# Altium PCB SDR_PCB.PcbDoc
Units mm, origin at the board's own origin, x right, y up, seen from the top; angles counter-clockwise.
Board outline 213.87 x 162.94 mm, 2 copper layers (Top Layer, Bottom Layer); 68 components, 64 nets, 444 pads, 6 vias.
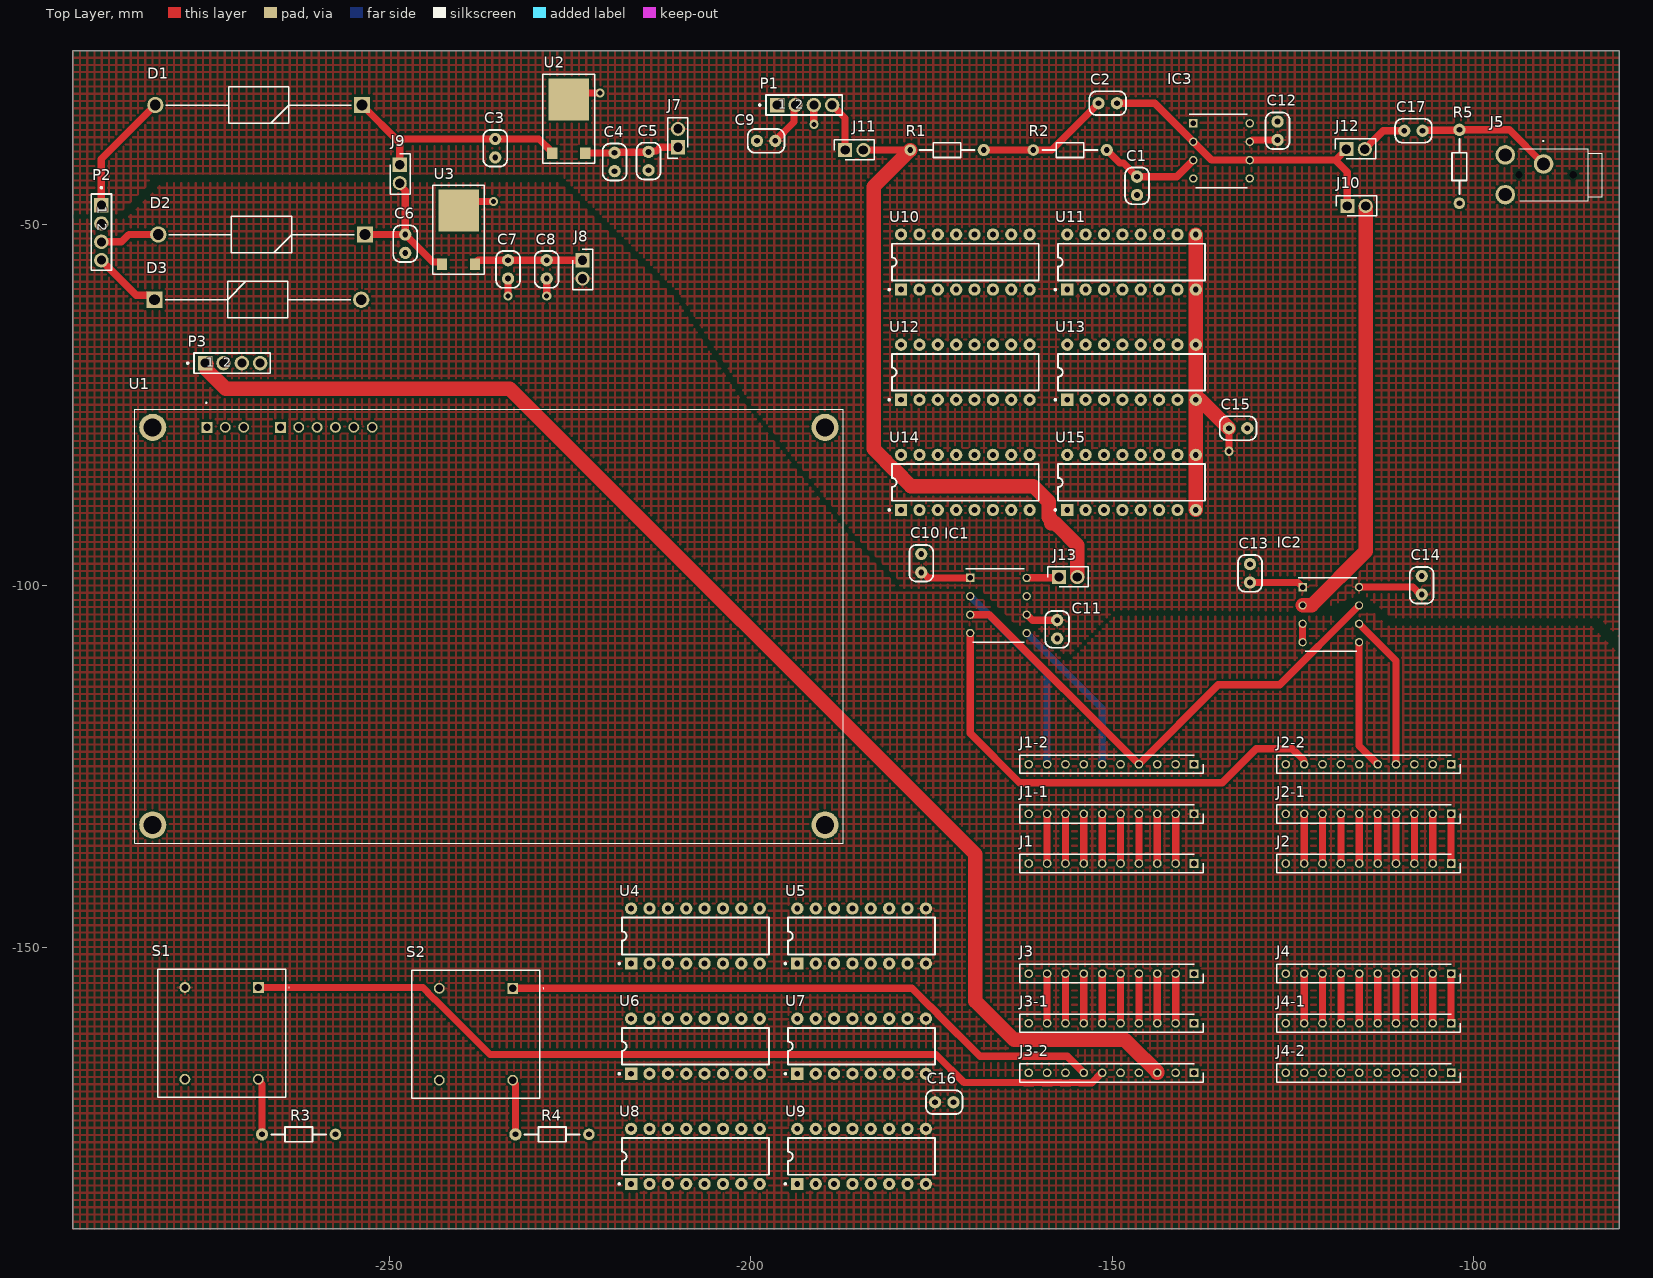
[diagram p0: Top Layer view]
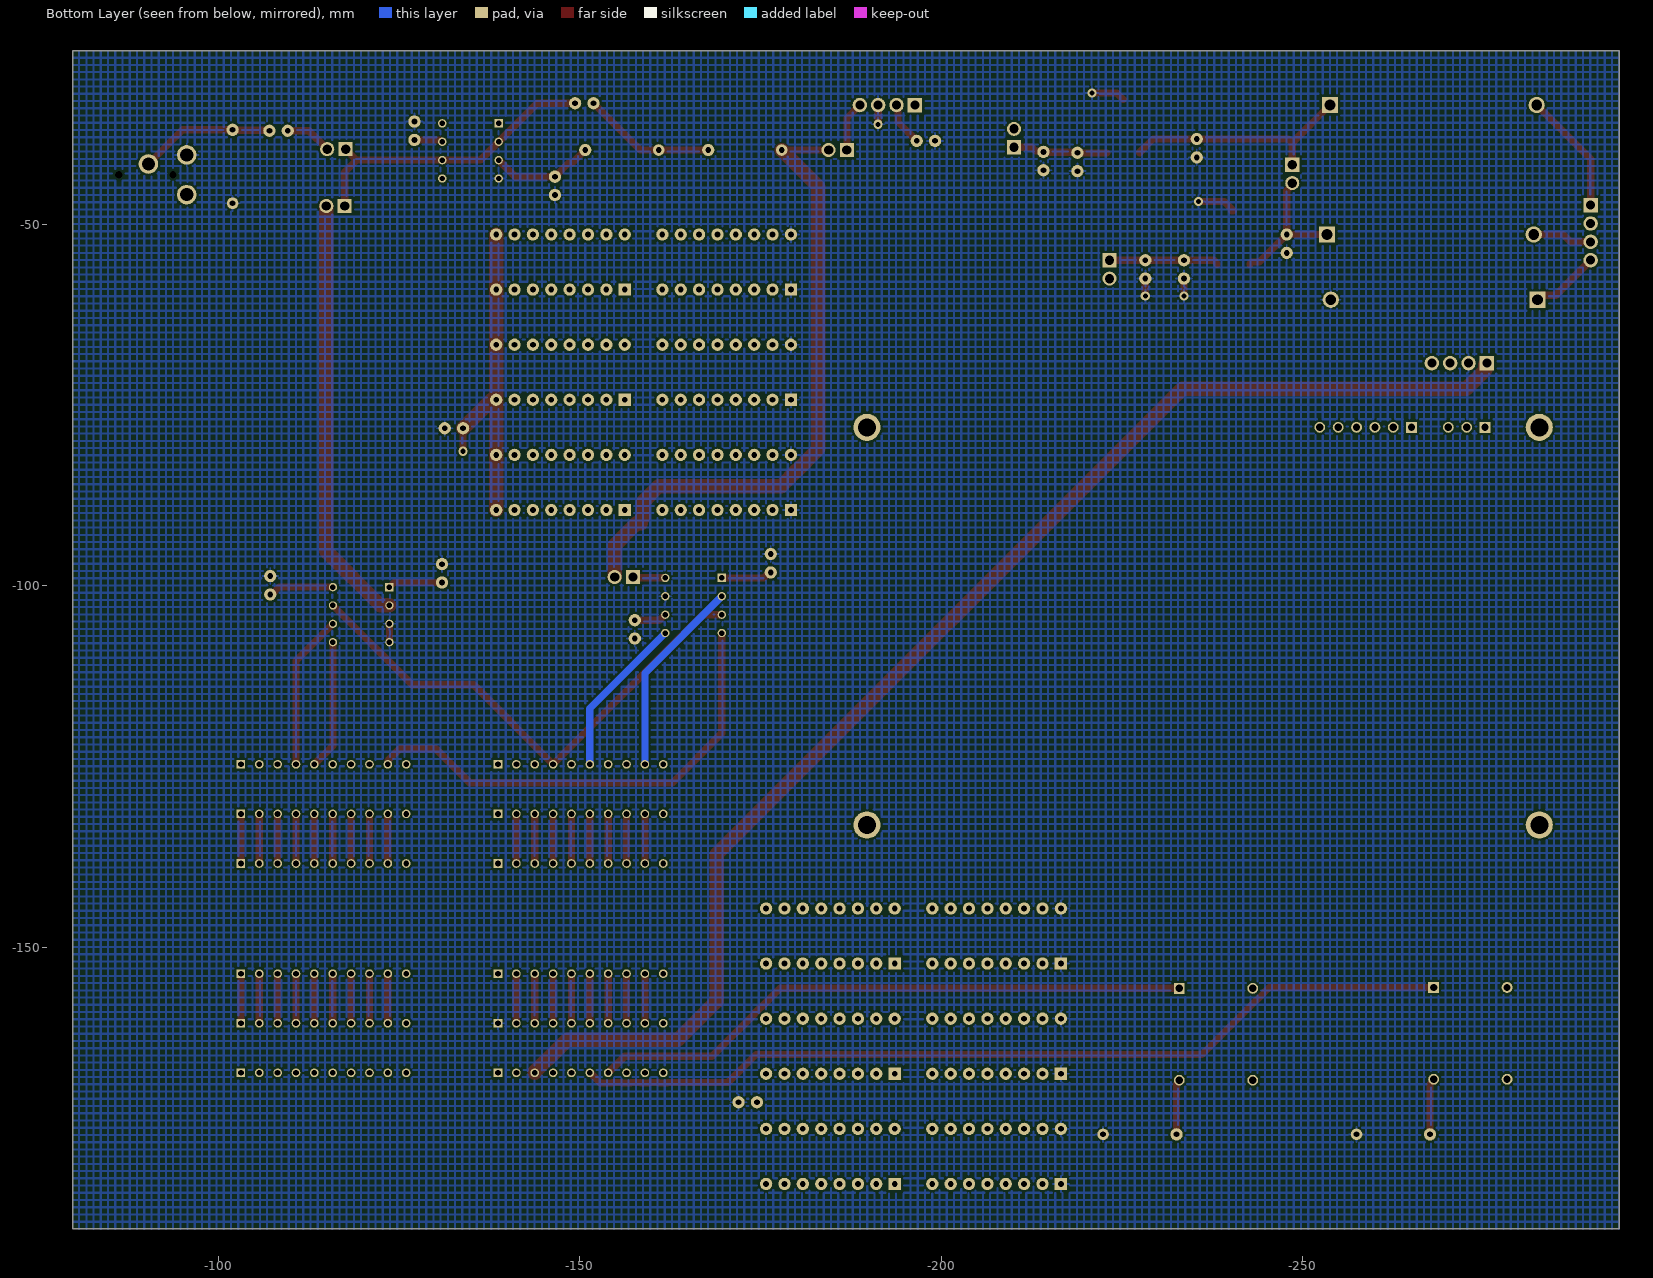
[diagram p1: Bottom Layer view, seen from below]

## Layer stack, top to bottom
Top Solder: solder mask 0.0102, Solder Resist, Dk 3.5
Top Layer: signal copper 0.0356
Dielectric 1: dielectric 0.32, FR-4, Dk 4.8
Bottom Layer: signal copper 0.0356
Bottom Solder: solder mask 0.0102, Solder Resist, Dk 3.5

## Board outline
-293.751,-188.976 -79.883,-188.976 -79.883,-26.035 -293.751,-26.035

## Design rules (kind name [scope] priority, off if disabled: settings)
Clearance [All] p1: gap=0.3 ignorepadtopadclearanceinfootprint=FALSE
PolygonConnect [All] p1: connectstyle=Relief reliefconductorwidth=0.254 reliefentries=4 polygonreliefangle="90 Angle" airgapwidth=0.254
RoutingVias [All] p1: holewidth=0.711 width=1.27 viastyle="Through Hole" minholewidth=0.711 minwidth=1.27 maxholewidth=0.711 maxwidth=1.27
SolderMaskExpansion [All] p1: expansion=0.102 istentingtop=FALSE
Width [All] p1: maxlimit=2 minlimit=0.3 preferedwidth=1 minimp=50.000000 maximp=50.000000 favimp=50.000000
30 further rules are at their usual default settings.

## Components (designator, comment, footprint, x,y, rotation, side; value= is the part's Value field where it differs from the comment)
C1 "4.7nF" CAPACITOR_100NF_TH -146.558,-45.974 r90 top
C2 "12nF" CAPACITOR_100NF_TH -151.892,-33.274 r0 top
C3 "10u" CAPACITOR_100NF_TH -235.331,-40.767 r90 top
C4 "10u" CAPACITOR_100NF_TH -218.821,-42.672 r90 top
C5 "100n" CAPACITOR_100NF_TH -214.122,-42.545 r90 top
C6 "10u" CAPACITOR_100NF_TH -247.777,-53.975 r90 top
C7 "10u" CAPACITOR_100NF_TH -233.553,-57.531 r90 top
C8 "100n" CAPACITOR_100NF_TH -228.219,-57.531 r90 top
C9 "100n" CAPACITOR_100NF_TH -196.596,-38.481 r180 top
C10 "100n" CAPACITOR_100NF_TH -176.403,-98.171 r90 top
C11 "100n" CAPACITOR_100NF_TH -157.607,-107.315 r90 top
C12 "100n" CAPACITOR_100NF_TH -127.127,-35.814 r270 top
C13 "100n" CAPACITOR_100NF_TH -130.937,-99.568 r90 top
C14 "100n" CAPACITOR_100NF_TH -107.188,-101.219 r90 top
C15 "100n" CAPACITOR_100NF_TH -131.318,-78.232 r180 top
C16 "100n" CAPACITOR_100NF_TH -171.958,-171.45 r180 top
C17 "10u" CAPACITOR_100NF_TH -107.061,-37.084 r180 top
D1 "SB350-E3_54" DIOAD2855W132L835D505 -253.746,-33.528 r180 top
D2 "SB350-E3_54" DIOAD2855W132L835D505 -253.34,-51.435 r180 top
D3 "SB350-E3_54" DIOAD2855W132L835D505 -282.473,-60.452 r0 top
IC1 "MCP4921-E_P" DIP781W56P254L950H533Q8N -165.735,-102.743 r0 top
IC2 "MCP3201-CI_P" DIP781W56P254L950H533Q8N -119.761,-104.013 r0 top
IC3 "MCP6231-E_P" DIP781W56P254L950H533Q8N -134.874,-39.878 r0 top
J1 "801-87-010-10-001101" RHDR10W60P0X254_1X10_2540X254X700P -138.684,-138.43 r180 top
J1-1 "801-87-010-10-001101" RHDR10W60P0X254_1X10_2540X254X700P -138.684,-131.572 r180 top
J1-2 "801-87-010-10-001101" RHDR10W60P0X254_1X10_2540X254X700P -138.684,-124.714 r180 top
J2 "801-87-010-10-001101" RHDR10W60P0X254_1X10_2540X254X700P -103.124,-138.43 r180 top
J2-1 "801-87-010-10-001101" RHDR10W60P0X254_1X10_2540X254X700P -103.124,-131.572 r180 top
J2-2 "801-87-010-10-001101" RHDR10W60P0X254_1X10_2540X254X700P -103.124,-124.714 r180 top
J3 "801-87-010-10-001101" RHDR10W60P0X254_1X10_2540X254X700P -138.684,-153.67 r180 top
J3-1 "801-87-010-10-001101" RHDR10W60P0X254_1X10_2540X254X700P -138.684,-160.528 r180 top
J3-2 "801-87-010-10-001101" RHDR10W60P0X254_1X10_2540X254X700P -138.684,-167.386 r180 top
J4 "801-87-010-10-001101" RHDR10W60P0X254_1X10_2540X254X700P -103.124,-153.67 r180 top
J4-1 "801-87-010-10-001101" RHDR10W60P0X254_1X10_2540X254X700P -103.124,-160.528 r180 top
J4-2 "801-87-010-10-001101" RHDR10W60P0X254_1X10_2540X254X700P -103.124,-167.386 r180 top
J5 "STX-3000" STX3000 -90.333,-41.68 r180 top
J7 "MKK1X2" RHDR2W79P0X254_1X2_559X241X851P -210.058,-39.37 r90 top
J8 "MKK1X2" RHDR2W79P0X254_1X2_559X241X851P -223.266,-54.991 r270 top
J9 "MKK1X2" RHDR2W79P0X254_1X2_559X241X851P -248.539,-41.783 r270 top
J10 "MKK1X2" RHDR2W79P0X254_1X2_559X241X851P -117.475,-47.498 r0 top
J11 "MKK1X2" RHDR2W79P0X254_1X2_559X241X851P -186.944,-39.751 r0 top
J12 "MKK1X2" RHDR2W79P0X254_1X2_559X241X851P -117.602,-39.624 r0 top
J13 "MKK1X2" RHDR2W79P0X254_1X2_559X241X851P -157.353,-98.806 r0 top
P1 "Microphone Module" HDH1X4 1054.735,1219.708 r0 top
P2 "UART and Power" HDH1X4 963.422,-1298.448 r270 top
P3 "UART and Power" HDH1X4 975.614,1184.015 r0 top
R1 "Resistor (IO board)" RESISTOR_10K_TH_QW -177.927,-39.751 r0 top
R2 "Resistor (IO board)" RESISTOR_10K_TH_QW -160.909,-39.751 r0 top
R3 "Resistor (IO board)" RESISTOR_10K_TH_QW -257.429,-175.895 r180 top
R4 "Resistor (IO board)" RESISTOR_10K_TH_QW -222.377,-175.895 r180 top
R5 "Resistor (IO board)" RESISTOR_10K_TH_QW -101.981,-47.117 r90 top
S1 "JF15SP3G" JF15SP3G -268.097,-155.575 r0 top
S2 "JF15SP3G" JF15SP3G -232.918,-155.702 r0 top
U1 "NHD-0420D3Z-FL-GBW-V3" NHD0420D3ZFLGBWV3 -275.209,-78.105 r0 top
U2 "L78M05CDT(3)" TO_252 -227.451,-40.166 r0 top
U3 "L78M05CDT(3)" TO_252 -242.691,-55.533 r0 top
U4 "ULN2003" "DILP-16(300) - 3D" -216.535,-152.273 r90 top
U5 "ULN2003" "DILP-16(300) - 3D" -193.548,-152.273 r90 top
U6 "ULN2003" "DILP-16(300) - 3D" -216.535,-167.513 r90 top
U7 "ULN2003" "DILP-16(300) - 3D" -193.548,-167.513 r90 top
U8 "ULN2003" "DILP-16(300) - 3D" -216.535,-182.753 r90 top
U9 "ULN2003" "DILP-16(300) - 3D" -193.548,-182.753 r90 top
U10 "ULN2003" "DILP-16(300) - 3D" -179.197,-59.055 r90 top
U11 "ULN2003" "DILP-16(300) - 3D" -156.21,-59.055 r90 top
U12 "ULN2003" "DILP-16(300) - 3D" -179.197,-74.295 r90 top
U13 "ULN2003" "DILP-16(300) - 3D" -156.21,-74.295 r90 top
U14 "ULN2003" "DILP-16(300) - 3D" -179.197,-89.535 r90 top
U15 "ULN2003" "DILP-16(300) - 3D" -156.21,-89.535 r90 top

## Footprints (in the part's own frame and the unit in brackets; to place one, negate y for a bottom-side part, rotate by r counter-clockwise, add the part's x,y. Pads: shape width x height; smd on the part's side, far side on the other; paste and mask are expansions set on the pad)
CAPACITOR_100NF_TH [mm]
  round 1.7 hole 0.8: 1(0,0) 2(2.54,0)
  silkscreen extent -1.27,-1.65 3.81,1.65
"DILP-16(300) - 3D" [mm]
  rect 1.7x1.7 hole 0.8: 1(0,0)
  round 1.7 hole 0.8: 2(0,-2.54) 3(0,-5.08) 4(0,-7.62) 5(0,-10.16) 6(0,-12.7) 7(0,-15.24) 8(0,-17.78) 9(7.62,-17.78) 10(7.62,-15.24) 11(7.62,-12.7) 12(7.62,-10.16) 13(7.62,-7.62) 14(7.62,-5.08) 15(7.62,-2.54) 16(7.62,0)
  silkscreen extent -0.12,-19.05 6.35,1.78
DIOAD2855W132L835D505 [mm]
  rect 2.25x2.25 hole 1.5: 1(0,0)
  round 2.25 hole 1.5: 2(28.6,0)
  silkscreen extent 1.48,-2.52 27.13,2.52, body extent -0.66,-2.65 29.21,2.65, height 5.29
DIP781W56P254L950H533Q8N [mm]
  rect 1.159x1.159 hole 0.759: 1(-3.905,3.81)
  round 1.159 hole 0.759: 2(-3.905,1.27) 3(-3.905,-1.27) 4(-3.905,-3.81) 5(3.905,-3.81) 6(3.905,-1.27) 7(3.905,1.27) 8(3.905,3.81)
  silkscreen extent -4.48,-5.08 3.56,5.08, body extent -7.75,-0.83 0.13,8.45, height 5.5
HDH1X4 [mm]
  rect 2x2 hole 1.25: 1(-1251.077,-1253.236)
  round 2 hole 1.25: 2(-1248.537,-1253.236) 3(-1245.997,-1253.236) 4(-1243.457,-1253.236)
  silkscreen extent -1253.61,-1254.63 -1242.06,-1251.84
JF15SP3G [mm]
  rect 1.5x1.5 hole 1: 1(0,0)
  round 1.5 hole 1: 2(0,-12.7) 3(-10.16,0) 4(-10.16,-12.7)
  silkscreen extent -13.93,-15.2 4.3,2.5, body extent -13.93,-15.2 3.77,2.5, height 6.88
NHD0420D3ZFLGBWV3 [mm]
  rect 1.5x1.5 hole 1: J11(0,0) J21(10.16,0)
  round 1.5 hole 1: J12(2.54,0) J13(5.08,0) J22(12.7,0) J23(15.24,0) J24(17.78,0) J25(20.32,0) J26(22.86,0)
  round 3.75 hole 2.5: MH1(-7.5,-55) MH2(-7.5,0) MH3(85.5,0) MH4(85.5,-55)
  silkscreen extent -10,-57.5 88,3.45, body extent -10,-57.02 88,2.98, height 13.36
RESISTOR_10K_TH_QW [mm]
  round 1.6 hole 0.8: 1(0,0)
  round 1.7 hole 0.8: 2(10.16,0)
  silkscreen extent 1.27,-1.02 8.89,1.02
RHDR2W79P0X254_1X2_559X241X851P [mm]
  rect 1.95x1.95 hole 1.3: 1(0,0)
  round 1.95 hole 1.3: 2(2.54,0)
  silkscreen extent -1.53,-1.33 4.07,1.45, body extent -1.53,-1.2 4.07,1.2, height 8.51
RHDR10W60P0X254_1X10_2540X254X700P [mm]
  rect 1.2x1.2 hole 0.8: 1(0,0)
  round 1.2 hole 0.8: 2(2.54,0) 3(5.08,0) 4(7.62,0) 5(10.16,0) 6(12.7,0) 7(15.24,0) 8(17.78,0) 9(20.32,0) 10(22.86,0)
  silkscreen extent -1.27,-1.27 24.13,1.27, body extent -1.27,-1.27 24.13,1.27, height 7
STX3000 [mm]
  round 2.704 hole 1.803: 1(0,0) 2(5.3,4.25) 3(5.3,-1.25)
  round 0.5 hole 1 unplated: MH1(-4.1,1.5) MH2(3.4,1.5)
  silkscreen extent -8.1,-3.25 3.3,5.1, body extent -8.15,-2.06 5.82,5.14, height 5.51
TO_252 [mm]
  rect 1.4x1.6 smd: 1(0,0) 3(4.57,0)
  rect 5.6x5.8 smd: 2(2.28,7.4)
  silkscreen extent -1.3,-1.4 5.87,10.9

## Part data
C1 C2: library part "Capacitor(IO Board)", "Capacitor 100nF"
C3 C4 C5 C6 C7 C8 C9 C10 C11 C12 C13 C14 C15 C16 C17: library part "Capacitor(IO Board)", "Capacitor 10u 25V tant"
D1 D2 D3: "Diode", Arrow Part Number=SB350-E3/54, Manufacturer_Name=Vishay, Mouser Part Number=625-SB350-E3/54, Arrow Price/Stock=https://www.arrow.com/en/products/sb350-e354/vishay?utm_currency=USD&region=europe, Datasheet Link=https://ms.componentsearchengine.com/Datasheets/2/SB350-E3_54.pdf, Manufacturer_Part_Number=SB350-E3/54, Mouser Price/Stock=https://www.mouser.co.uk/ProductDetail/Vishay-General-Semiconductor/SB350-E3-54?qs=u91jd7aysvP1Ohy47XJYyw%3D%3D
IC1: "Integrated Circuit", Arrow Part Number=MCP4921-E/P, Manufacturer_Name=Microchip, Mouser Part Number=579-MCP4921-E/P, Arrow Price/Stock=https://www.arrow.com/en/products/mcp4921-ep/microchip-technology?utm_currency=USD&region=nac, Datasheet Link=https://datasheet.datasheetarchive.com/originals/distributors/SFDatasheet-4/sf-00090085.pdf, Height=5.334mm, Manufacturer_Part_Number=MCP4921-E/P, Mouser Price/Stock=https://www.mouser.co.uk/ProductDetail/Microchip-Technology/MCP4921-E-P?qs=1zyQUV6YKYz%252BhdPnOOm6sg%3D%3D
IC2: "Integrated Circuit", Arrow Part Number=MCP3201-CI/P, Manufacturer_Name=Microchip, Mouser Part Number=579-MCP3201-CI/P, Arrow Price/Stock=https://www.arrow.com/en/products/mcp3201-cip/microchip-technology?utm_currency=USD&region=nac, Datasheet Link=http://uk.rs-online.com/web/p/products/3792386, Height=5.334mm, Manufacturer_Part_Number=MCP3201-CI/P, Mouser Price/Stock=https://www.mouser.co.uk/ProductDetail/Microchip-Technology/MCP3201-CI-P?qs=mcPJWgAPNre%2FsJDHtNvcCw%3D%3D
IC3: "Integrated Circuit", Arrow Part Number=MCP6231-E/P, Manufacturer_Name=Microchip, Mouser Part Number=579-MCP6231-E/P, Arrow Price/Stock=https://www.arrow.com/en/products/mcp6231-ep/microchip-technology?region=nac, Datasheet Link=https://ww1.microchip.com/downloads/en/DeviceDoc/20001881G%20MCP6231-20%20uA%20300%20kHz%20Rail-to-Rail%20Op%20Amp.pdf, Height=5.334mm, Manufacturer_Part_Number=MCP6231-E/P, Mouser Price/Stock=https://www.mouser.co.uk/ProductDetail/Microchip-Technology/MCP6231-E-P?qs=gZwDaUDMhIfJIVq4F%252Btnbg%3D%3D
J1 J1-1 J1-2 J2 J2-1 J2-2 J3 J3-1 J3-2 J4 J4-1 J4-2: "Connector", Manufacturer_Name=Preci-Dip, Mouser Part Number=437-8018701010001101, Arrow Part Number=801-87-010-10-001101, Arrow Price/Stock=https://www.arrow.com/en/products/801-87-010-10-001101/preci-dip-sa, Datasheet Link=http://www.precidip.com/AppHost/9696,1/Scripts/Modules/Catalog/Default.aspx?c=7&i=310&p=107&pdf=1&dsku=801-PP-NNN-10-001101, Height=7mm, Manufacturer_Part_Number=801-87-010-10-001101, Mouser Price/Stock=https://www.mouser.co.uk/ProductDetail/Preci-dip/801-87-010-10-001101?qs=FtMuP6KVi2QQbG5SyYm4QA%3D%3D
J5: "Connector", Manufacturer_Name=Kycon, Mouser Part Number=806-STX-3000, Datasheet Link=http://www.kycon.com/Pub_Eng_Draw/STX-3000.pdf, Manufacturer_Part_Number=STX-3000, Mouser Price/Stock=https://www.mouser.co.uk/ProductDetail/Kycon/STX-3000?qs=kjZ2mQLP346Nbz1X9BOzfg%3D%3D
J7 J8 J9 J10 J11 J12 J13: library part SOCKET(2), "2-Way Socket", Part Number=143-126, Supplier=Farnell
P1 P2 P3: library part "Header 4", "Header, 4-Pin", LatestRevisionDate=17-Jul-2002, LatestRevisionNote="Re-released for DXP Platform.", Publisher="Altium Limited"
R1 R2 R3 R4 R5: library part "Resistor(IO board)", "Resistor (SFR25)"
S1 S2: "Switch (4-Pin Push)", Manufacturer_Name="NKK Switches", Mouser Part Number=633-JF15SP3G, Datasheet Link=https://www.nkkswitches.com/pdf/JFnonilluminated-1.pdf, Height=6.78mm, Manufacturer_Part_Number=JF15SP3G, Mouser Price/Stock=https://www.mouser.co.uk/ProductDetail/NKK-Switches/JF15SP3G?qs=C5yZ6ouz9zMC%252Bh3z2Fkoaw%3D%3D
U1: "Undefined or Miscellaneous", Manufacturer_Name="Newhaven Display", Mouser Part Number=763-0420D3ZFLGBW-V3, Datasheet Link=https://componentsearchengine.com/Datasheets/1/NHD-0420D3Z-FL-GBW-V3.pdf, Height=9.34mm, Manufacturer_Part_Number=NHD-0420D3Z-FL-GBW-V3, Mouser Price/Stock=https://www.mouser.co.uk/ProductDetail/Newhaven-Display/NHD-0420D3Z-FL-GBW-V3?qs=qFF%252BBcFBHba4i0K1fcOqkw%3D%3D
U2 U3: library part L78M05ACDT(3), "Very Low Drop Voltage Regulators With Inhibit"
U4 U5 U6 U7 U8 U9 U10 U11 U12 U13 U14 U15: "Darlington Transistor Array", Supplier Part Number 1=1470512, Supplier 1=Farnell

## Via types
v1: diameter 1.27, hole 0.711, Top Layer to Bottom Layer, 6 vias

## Nets (pads, with @x,y where several pads share a name; then routed paths per layer and width w, separated by ;. In a path a pad name is that pad's centre, name@x,y a point inside that pad or via, vN(x,y) a via of type N, cw(c..) or ccw(c..) an arc to the next point about the centre after c; other vN are vias at no path point)
+5V_ANLG: C9.1 C10.1 C11.2 C12.2 C13.1 C14.1 C15.2 IC1.1 IC1.6 IC2.1 IC2.8 IC3.7 J7.2 P1.2 U11.8 U11.9 U13.8 U13.9 U15.8 U15.9 | length 85.8
  Top Layer w1: C9.1 -193.993,-35.878 -193.993,-33.719 P1.2 ; C10.1 -176.214,-98.171 -175.452,-98.933 IC1.1 ; IC1.6 -161.787,-104.013 -161.025,-104.775 C11.2 ; v1(-133.858,-81.407) C15.2 ; IC3.7 -130.926,-38.608 -130.672,-38.354 C12.2 ; C13.1 -124.301,-99.568 IC2.1 ; IC2.8 -108.393,-100.203 -107.377,-101.219 C14.1
  Top Layer w2: U15.8 U15.9 U13.8 ; U11.9 U11.8 U13.9 U13.8 ; C15.2 -137.795,-74.295 U13.8
+5V_DIG: C16.2 J1-1.1 J8.2 P3.3 S1.3 S2.3 U5.8 U5.9 U7.8 U7.9 U9.8 U9.9
GND: C1.1 C3.1 C4.1 C5.1 C6.1 C7.1 C8.1 C9.2 C10.2 C11.1 C12.1 C13.2 C14.2 C15.1 C16.1 D3.2 IC1.7 IC2.3 IC2.4 IC3.4 J3-1.1 J5.3 P1.3 P3.2 R3.1 R4.1 R5.1 U2.2 U3.2 U4.1 U4.16 U6.1 U6.16 U8.1 U8.16 U10.1 U10.16 U12.1 U12.16 U14.1 U14.16 | length 20.4
  Top Layer w1: U3.2@-240.157,-48.133 U3.2 -239.141,-46.863 v1(-235.585,-46.863) ; v1(-233.553,-59.944) C7.1 ; v1(-228.219,-59.944) C8.1 ; U2.2 -224.282,-31.877 v1(-220.853,-31.877) ; v1(-191.262,-36.195) P1.3 ; C12.1 C12.1@-127.052,-35.739 ; IC2.4 IC2.3
NetC1_2: C1.2 IC3.3 R2.2 | length 14.4
  Top Layer w1: R2.2 -148.955,-41.545 -148.447,-41.545 C1.2 -141.065,-43.434 IC3.3
NetC2_1: C2.1 R1.2 R2.1 | length 18.6
  Top Layer w1: R1.2 R2.1 -158.369,-39.751 C2.1
NetC2_2: C2.2 IC3.2 IC3.6 J10.1 J12.1 | length 42.7
  Top Layer w1: C2.2 -144.113,-33.274 IC3.2 -136.239,-41.148 IC3.6 -119.126,-41.148 ; J12.1 -119.126,-41.148 ; J10.1 -117.475,-42.799 -119.126,-41.148
NetC3_2: C3.2 D1.1 J9.1 U2.1 | length 32.7
  Top Layer w1: D1.1 -248.539,-38.735 ; J9.1@-248.666,-41.783 J9.1 -248.539,-38.735 ; U2.1 -227.451,-40.066 -229.29,-38.227 C3.2 -248.031,-38.227 -248.539,-38.735
NetC4_2: C4.2 C5.2 J7.1 U2.3 | length 13.2
  Top Layer w1: U2.3 -222.864,-40.149 -218.838,-40.149 C4.2 -218.757,-40.069 -214.185,-40.069 C5.2 -213.988,-39.871 -213.034,-39.871 -212.533,-39.37 J7.1
NetC6_2: C6.2 D2.1 J9.2 U3.1 | length 19.8
  Top Layer w1: D2.1 C6.2 ; J9.2 -248.539,-44.58 -247.777,-45.342 C6.2 ; U3.1 -242.691,-55.433 -242.891,-55.233 -243.979,-55.233 C6.2
NetC7_2: C7.2 C8.2 J8.1 U3.3 | length 15.1
  Top Layer w1: U3.3 -238.121,-55.433 -237.679,-54.991 C7.2 C8.2 J8.1
NetC17_1: C17.1 J5.1 R5.2 | length 18.7
  Top Layer w1: C17.1 -106.998,-37.02 -102.044,-37.02 R5.2 -95.056,-36.957 J5.1
NetC17_2: C17.2 J12.2 | length 6.5
  Top Layer w1: J12.2 -112.522,-37.084 C17.2
NetD1_2: D1.2 P2.1 | length 16.9
  Top Layer w1: P2.1 -289.814,-40.996 D1.2
NetD2_2: D2.2 P2.3 | length 8.3
  Top Layer w1: P2.3 -287.02,-52.451 -286.004,-51.435 D2.2
NetD3_1: D3.1 P2.4 | length 9.6
  Top Layer w1: P2.4 -284.978,-59.827 -283.098,-59.827 D3.1
NetIC1_2: IC1.2 J1-2.9 | length 27.6
  Bottom Layer w1: IC1.2 -159.004,-112.109 J1-2.9
NetIC1_3: IC1.3 IC2.7 J1-2.4 | length 71.5
  Top Layer w1: IC1.3 -167.005,-104.013 J1-2.4 -135.315,-113.725 -126.838,-113.725 IC2.7
NetIC1_4: IC1.4 J2-2.9 | length 66
  Top Layer w1: IC1.4 -169.64,-120.428 -162.814,-127.254 -134.764,-127.254 -130.065,-122.555 -125.095,-122.555 -123.482,-124.168 -123.482,-124.676 J2-2.9
NetIC1_5: IC1.5 J1-2.6 | length 22.5
  Bottom Layer w1: IC1.5 -151.384,-116.999 J1-2.6
NetIC1_8: IC1.8 J13.1 | length 4.5
  Top Layer w1: IC1.8 -161.8,-98.903 -157.45,-98.903 J13.1
NetIC2_2: IC2.2 J10.2 | length 59.6
  Top Layer w2: IC2.2 -122.428,-102.743 -114.935,-95.25 J10.2
NetIC2_5: IC2.5 J2-2.5 | length 18
  Top Layer w1: IC2.5 -115.856,-122.142 J2-2.5
NetIC2_6: IC2.6 J2-2.4 | length 21.5
  Top Layer w1: IC2.6 -110.744,-110.395 J2-2.4
NetJ1-1_2: J1-1.2 J1.2 | length 6.9
  Top Layer w1: J1.2 J1-1.2
NetJ1-1_3: J1-1.3 J1.3 | length 6.9
  Top Layer w1: J1.3 J1-1.3
NetJ1-1_4: J1-1.4 J1.4 | length 6.9
  Top Layer w1: J1.4 J1-1.4
NetJ1-1_5: J1-1.5 J1.5 | length 6.9
  Top Layer w1: J1.5 J1-1.5
NetJ1-1_6: J1-1.6 J1.6 | length 6.9
  Top Layer w1: J1.6 J1-1.6
NetJ1-1_7: J1-1.7 J1.7 | length 6.9
  Top Layer w1: J1.7 J1-1.7
NetJ1-1_8: J1-1.8 J1.8 | length 6.9
  Top Layer w1: J1.8 J1-1.8
NetJ1-1_9: J1-1.9 J1.9 | length 6.9
  Top Layer w1: J1.9 J1-1.9
NetJ2-1_1: J2-1.1 J2.1 | length 6.9
  Top Layer w1: J2.1 J2-1.1
NetJ2-1_2: J2-1.2 J2.2 | length 6.9
  Top Layer w1: J2.2 J2-1.2
NetJ2-1_3: J2-1.3 J2.3 | length 6.9
  Top Layer w1: J2.3 J2-1.3
NetJ2-1_4: J2-1.4 J2.4 | length 6.9
  Top Layer w1: J2.4 J2-1.4
NetJ2-1_5: J2-1.5 J2.5 | length 6.9
  Top Layer w1: J2.5 J2-1.5
NetJ2-1_6: J2-1.6 J2.6 | length 6.9
  Top Layer w1: J2.6 J2-1.6
NetJ2-1_7: J2-1.7 J2.7 | length 6.9
  Top Layer w1: J2.7 J2-1.7
NetJ2-1_8: J2-1.8 J2.8 | length 6.9
  Top Layer w1: J2.8 J2-1.8
NetJ2-1_9: J2-1.9 J2.9 | length 6.9
  Top Layer w1: J2.9 J2-1.9
NetJ3-1_2: J3-1.2 J3.2 | length 6.9
  Top Layer w1: J3-1.2 J3.2
NetJ3-1_3: J3-1.3 J3.3 | length 6.9
  Top Layer w1: J3-1.3 J3.3
NetJ3-1_4: J3-1.4 J3.4 | length 6.9
  Top Layer w1: J3-1.4 J3.4
NetJ3-1_5: J3-1.5 J3.5 | length 6.9
  Top Layer w1: J3-1.5 J3.5
NetJ3-1_6: J3-1.6 J3.6 | length 6.9
  Top Layer w1: J3-1.6 J3.6
NetJ3-1_7: J3-1.7 J3.7 | length 6.9
  Top Layer w1: J3-1.7 J3.7
NetJ3-1_8: J3-1.8 J3.8 | length 6.9
  Top Layer w1: J3-1.8 J3.8
NetJ3-1_9: J3-1.9 J3.9 | length 6.9
  Top Layer w1: J3-1.9 J3.9
NetJ3-2_3: J3-2.3 P3.1 | length 184.8
  Top Layer w2: P3.1 -275.223,-69.461 -275.223,-70.174 -272.626,-72.771 -233.299,-72.771 -168.91,-137.16 -168.91,-157.48 -163.576,-162.814 -148.254,-162.814 -145.582,-165.486 -145.517,-165.486 -143.764,-167.239 J3-2.3
NetJ3-2_6: J3-2.6 S1.1 | length 122.9
  Top Layer w1: S1.1 -245.332,-155.575 -244.628,-156.279 -244.628,-156.344 -243.72,-157.252 -243.655,-157.252 -236.061,-164.846 -174.371,-164.846 -170.477,-168.74 -162.17,-168.74 -162.124,-168.786 -160.964,-168.786 -160.918,-168.74 -159.63,-168.74 -159.584,-168.786 -158.424,-168.786 -158.378,-168.74 -157.09,-168.74 -157.044,-168.786 -155.884,-168.786 -155.838,-168.74 -154.55,-168.74 -154.504,-168.786 -152.838,-168.786 -151.438,-167.386 J3-2.6
NetJ3-2_7: J3-2.7 S2.1 | length 83.9
  Top Layer w1: S2.1 -177.691,-155.702 -175.15,-158.243 -175.085,-158.243 -174.118,-159.21 -174.118,-159.275 -168.293,-165.1 -156.21,-165.1 J3-2.7
NetJ4-1_1: J4-1.1 J4.1 | length 6.9
  Top Layer w1: J4-1.1 J4.1
NetJ4-1_2: J4-1.2 J4.2 | length 6.9
  Top Layer w1: J4-1.2 J4.2
NetJ4-1_3: J4-1.3 J4.3 | length 6.9
  Top Layer w1: J4-1.3 J4.3
NetJ4-1_4: J4-1.4 J4.4 | length 6.9
  Top Layer w1: J4-1.4 J4.4
NetJ4-1_5: J4-1.5 J4.5 | length 6.9
  Top Layer w1: J4-1.5 J4.5
NetJ4-1_6: J4-1.6 J4.6 | length 6.9
  Top Layer w1: J4-1.6 J4.6
NetJ4-1_7: J4-1.7 J4.7 | length 6.9
  Top Layer w1: J4-1.7 J4.7
NetJ4-1_8: J4-1.8 J4.8 | length 6.9
  Top Layer w1: J4-1.8 J4.8
NetJ4-1_9: J4-1.9 J4.9 | length 6.9
  Top Layer w1: J4-1.9 J4.9
NetJ11_1: J11.1 P1.4 | length 7
  Top Layer w1: P1.4 -186.944,-35.306 J11.1
NetJ11_2: J11.2 J13.2 R1.1 | length 89.7
  Top Layer w1: J11.2 R1.1
  Top Layer w2: R1.1 -183.007,-44.831 -183.007,-81.081 -181.347,-82.741 -181.347,-82.806 -180.088,-84.065 -180.023,-84.065 -177.863,-86.224 -160.917,-86.224 -158.75,-88.392 -158.75,-90.533 -158.462,-90.821 -158.462,-91.397 -157.886,-91.397 -157.598,-91.685 -157.533,-91.685 -154.813,-94.405 J13.2
NetR3_2: R3.2 S1.2 | length 7.8
  Top Layer w1: S1.2 -268.097,-168.41 -267.589,-168.918 R3.2
NetR4_2: R4.2 S2.2 | length 7.7
  Top Layer w1: S2.2 -232.918,-168.537 -232.537,-168.918 R4.2
pads on no net: IC3.1 IC3.5 IC3.8 J1-1.10 J1-2.1 J1-2.2 J1-2.3 J1-2.5 J1-2.7 J1-2.8 J1-2.10 J1.1 J1.10 J2-1.10 J2-2.1 J2-2.2 J2-2.3 J2-2.6 J2-2.7 J2-2.8 J2-2.10 J2.10 J3-1.10 J3-2.1 J3-2.2 J3-2.4 J3-2.5 J3-2.8 J3-2.9 J3-2.10 J3.1 J3.10 J4-1.10 J4-2.1 J4-2.2 J4-2.3 J4-2.4 J4-2.5 J4-2.6 J4-2.7 J4-2.8 J4-2.9 J4-2.10 J4.10 J5.2 J5.MH1 J5.MH2 P1.1 P2.2 P3.4 S1.4 S2.4 U1.J11 U1.J12 U1.J13 U1.J21 U1.J22 U1.J23 U1.J24 U1.J25 U1.J26 U1.MH1 U1.MH2 U1.MH3 U1.MH4 U4.2 U4.3 U4.4 U4.5 U4.6 U4.7 U4.8 U4.9 U4.10 U4.11 U4.12 U4.13 U4.14 U4.15 U5.1 U5.2 U5.3 U5.4 U5.5 U5.6 U5.7 U5.10 U5.11 U5.12 U5.13 U5.14 U5.15 U5.16 U6.2 U6.3 U6.4 U6.5 U6.6 U6.7 U6.8 U6.9 U6.10 U6.11 U6.12 U6.13 U6.14 U6.15 U7.1 U7.2 U7.3 U7.4 U7.5 U7.6 U7.7 U7.10 U7.11 U7.12 U7.13 U7.14 U7.15 U7.16 U8.2 U8.3 U8.4 U8.5 U8.6 U8.7 U8.8 U8.9 U8.10 U8.11 U8.12 U8.13 U8.14 U8.15 U9.1 U9.2 U9.3 U9.4 U9.5 U9.6 U9.7 U9.10 U9.11 U9.12 U9.13 U9.14 U9.15 U9.16 U10.2 U10.3 U10.4 U10.5 U10.6 U10.7 U10.8 U10.9 U10.10 U10.11 U10.12 U10.13 U10.14 U10.15 U11.1 U11.2 U11.3 U11.4 U11.5 U11.6 U11.7 U11.10 U11.11 U11.12 U11.13 U11.14 U11.15 U11.16 U12.2 U12.3 U12.4 U12.5 U12.6 U12.7 U12.8 U12.9 U12.10 U12.11 U12.12 U12.13 U12.14 U12.15 U13.1 U13.2 U13.3 U13.4 U13.5 U13.6 U13.7 U13.10 U13.11 U13.12 U13.13 U13.14 U13.15 U13.16 U14.2 U14.3 U14.4 U14.5 U14.6 U14.7 U14.8 U14.9 U14.10 U14.11 U14.12 U14.13 U14.14 U14.15 U15.1 U15.2 U15.3 U15.4 U15.5 U15.6 U15.7 U15.10 U15.11 U15.12 U15.13 U15.14 U15.15 U15.16

## Polygon pours and split planes (outlines as drawn)
+5V_DIG on Top Layer "+5V_DIG_L01_P002" (hatched 90Degree grid 1 track 0.3, pour order 2): -293.751,-188.976 -79.883,-188.976 -79.883,-109.601 -83.82,-105.664 -112.649,-105.664 -112.649,-105.029 -113.792,-103.886 -117.729,-103.886 -118.11,-104.267 -149.606,-104.267 -156.273,-110.934 -161.163,-106.045 -164.147,-106.045 -164.465,-105.41 -168.91,-100.965 -180.086,-100.965 -180.086,-99.695 -185.801,-93.98 -201.676,-73.914 -210.439,-60.325 -226.441,-44.323 -281.305,-44.323 -283.083,-46.101 -286.385,-49.403 -293.751,-49.403
+5V_ANLG on Top Layer "+5V_ANLG_L01_P001" (hatched 90Degree grid 1 track 0.3, pour order 1): -293.751,-26.035 -79.883,-26.035 -79.883,-107.061 -82.55,-104.394 -111.277,-104.394 -115.275,-101.063 -122.174,-103.505 -149.606,-103.251 -156.21,-109.855 -160.655,-105.41 -163.195,-105.41 -168.275,-100.33 -179.324,-100.33 -179.324,-99.314 -184.912,-93.726 -199.644,-75.184 -209.804,-59.563 -226.314,-43.053 -283.21,-43.053 -283.21,-44.323 -287.401,-48.514 -293.751,-48.514
GND on Bottom Layer "GND_L02_P000" (hatched 90Degree grid 1 track 0.3, pour order 0): -293.751,-26.035 -79.883,-26.035 -79.883,-188.976 -293.751,-188.976

## Silkscreen, mask and mechanical layers (free items; w line width, h text height)
Mechanical 2:
  drawing of 225 lines, arcs and shapes, not listed
Mechanical 3:
  circle w0.013: c-161.544,-153.67 r0.534
  circle w0.013: c-148.844,-153.67 r0.534
  circle w0.013: c-159.004,-153.67 r0.534
  circle w0.013: c-156.464,-153.67 r0.534
  circle w0.013: c-153.924,-153.67 r0.534
  circle w0.013: c-151.384,-153.67 r0.534
  circle w0.013: c-146.304,-153.67 r0.534
  circle w0.013: c-143.764,-153.67 r0.534
  circle w0.013: c-141.224,-153.67 r0.534
  circle w0.013: c-105.664,-153.67 r0.534
  circle w0.013: c-123.444,-153.67 r0.534
  circle w0.013: c-120.904,-153.67 r0.534
  circle w0.013: c-118.364,-153.67 r0.534
  circle w0.013: c-115.824,-153.67 r0.534
  circle w0.013: c-113.284,-153.67 r0.534
  circle w0.013: c-110.744,-153.67 r0.534
  circle w0.013: c-108.204,-153.67 r0.534
  circle w0.013: c-103.124,-153.67 r0.534
  circle w0.013: c-99.294,-152.4 r0.534
  circle w0.013: c-96.794,-152.4 r0.534
  circle w0.013: c-156.464,-138.43 r0.534
  circle w0.013: c-153.924,-138.43 r0.534
  circle w0.013: c-151.384,-138.43 r0.534
  circle w0.013: c-148.844,-138.43 r0.534
  circle w0.013: c-146.304,-138.43 r0.534
  circle w0.013: c-143.764,-138.43 r0.534
  circle w0.013: c-141.224,-138.43 r0.534
  circle w0.013: c-96.794,-144.78 r0.534
  circle w0.013: c-99.294,-142.24 r0.534
  circle w0.013: c-99.294,-139.7 r0.534
  circle w0.013: c-99.294,-147.32 r0.534
  circle w0.013: c-99.294,-149.86 r0.534
  circle w0.013: c-99.294,-144.78 r0.534
  circle w0.013: c-96.794,-139.7 r0.534
  circle w0.013: c-96.794,-142.24 r0.534
  circle w0.013: c-96.794,-149.86 r0.534
  circle w0.013: c-96.794,-147.32 r0.534
  circle w0.013: c-161.544,-138.43 r0.534
  circle w0.013: c-159.004,-138.43 r0.534
  circle w0.013: c-123.444,-138.43 r0.534
  circle w0.013: c-115.824,-138.43 r0.534
  circle w0.013: c-120.904,-138.43 r0.534
  circle w0.013: c-118.364,-138.43 r0.534
  circle w0.013: c-113.284,-138.43 r0.534
  circle w0.013: c-110.744,-138.43 r0.534
  circle w0.013: c-108.204,-138.43 r0.534
  circle w0.013: c-105.664,-138.43 r0.534
  circle w0.013: c-103.124,-138.43 r0.534
  lines w0.013: -162.91,-149.95 cw(c-162.91,-149.65) -162.91,-149.35 -162.21,-149.35 cw(c-162.21,-149.65) -162.21,-149.95 -162.91,-149.95 ; -162.91,-142.75 cw(c-162.91,-142.45) -162.91,-142.15 -162.21,-142.15 cw(c-162.21,-142.45) -162.21,-142.75 -162.91,-142.75 ; -160.01,-149.475 ccw(c-159.71,-149.475) -159.41,-149.475 -159.41,-149.225 ccw(c-159.71,-149.225) -160.01,-149.225 -160.01,-149.475 ; -160.01,-142.875 ccw(c-159.71,-142.875) -159.41,-142.875 -159.41,-142.625 ccw(c-159.71,-142.625) -160.01,-142.625 -160.01,-142.875
Mechanical 4:
  drawing of 413 lines, arcs and shapes, not listed

## Text inside footprints (layer, text, board x,y; h text height)
P1: Top Overlay "1" at -196.19,-34.036 h1.27; Top Overlay "2" at -193.827,-34.036 h1.27
P2: Top Overlay "2" at -290.322,-49.886 h1.27 r270; Top Overlay "1" at -290.322,-47.523 h1.27 r270
P3: Top Overlay "2" at -272.948,-69.729 h1.27; Top Overlay "1" at -275.311,-69.729 h1.27